# Altium PCB 电调.PcbDoc
Units mil, origin at the board's own origin, x right, y up, seen from the top; angles counter-clockwise.
Board outline 1660.03 x 865.03 mil, 2 copper layers (Top Layer, Bottom Layer); 78 components, 0 nets, 278 pads, 174 vias.
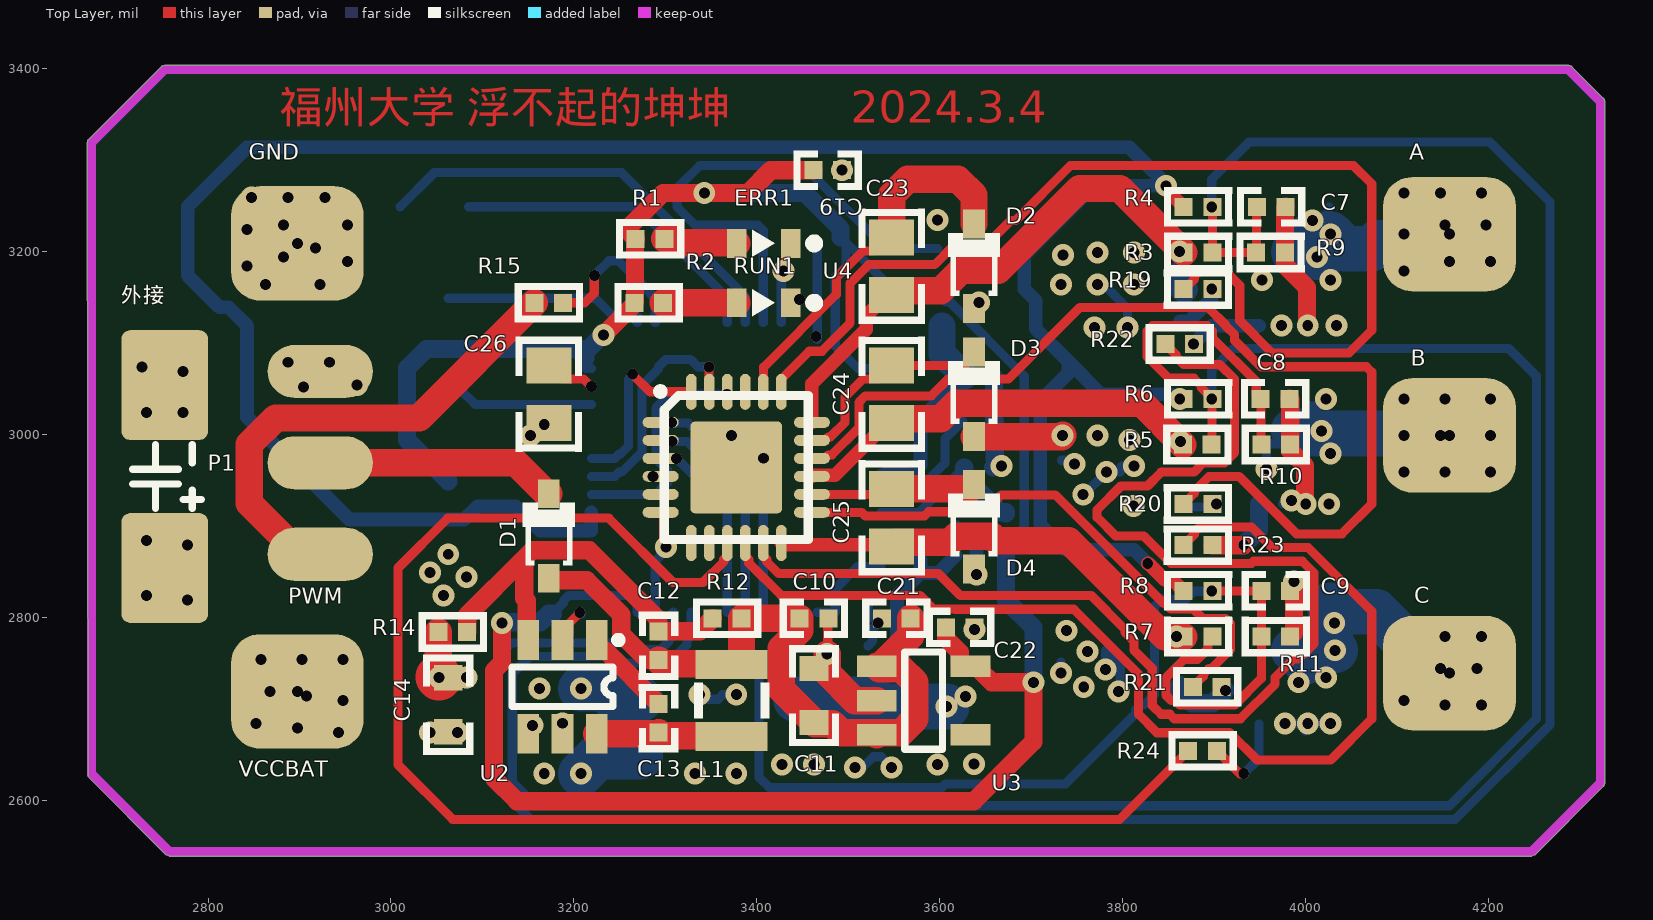
[diagram p0: Top Layer view]
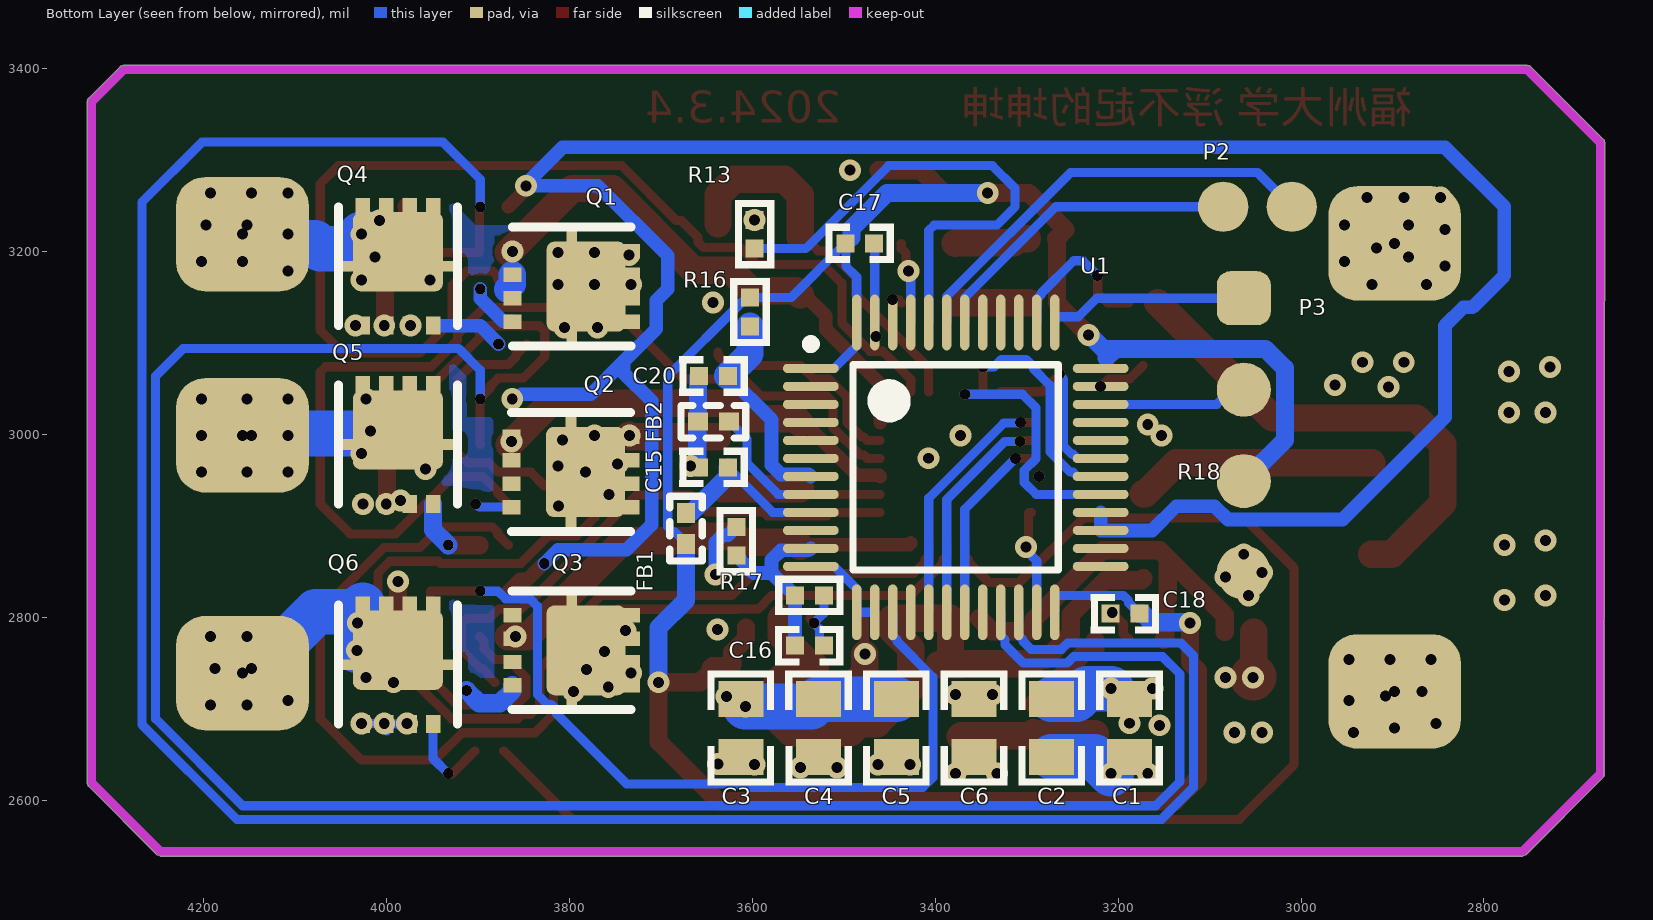
[diagram p1: Bottom Layer view, seen from below]

## Layer stack, top to bottom
Top Solder: solder mask 0.4, Solder Resist, Dk 3.5
Top Layer: signal copper 1.4
Dielectric 1: dielectric 12.6, FR-4, Dk 4.8
Bottom Layer: signal copper 1.4
Bottom Solder: solder mask 0.4, Solder Resist, Dk 3.5

## Board outline
2669.14,2625.41 2754.14,2540.41 2757.69,2538.94 4247.69,2538.94 4251.24,2540.41 4326.24,2615.41 4327.71,2618.96 4327.71,3363.96 4326.24,3367.5 4291.24,3402.5 4287.69,3403.97 2847.72,3403.97 2837.69,3403.97 2847.69,3403.97 2752.69,3403.97 2749.14,3402.5 2669.14,3322.5 2667.68,3318.96

## Design rules (kind name [scope] priority, off if disabled: settings)
Clearance [All] p1: gap=10 ignorepadtopadclearanceinfootprint=FALSE except(0: Arc-Hole Track-Hole SMDPad-Hole THPad-Hole Via-Hole Fill-Hole Poly-Hole Region-Hole Text-Hole)
PolygonConnect [All] p1: connectstyle=Relief reliefconductorwidth=10 reliefentries=4 polygonreliefangle="90 Angle" airgapwidth=10
RoutingVias [All] p1: holewidth=28 width=50 viastyle="Through Hole" minholewidth=28 minwidth=50 maxholewidth=28 maxwidth=50
SolderMaskExpansion [All] p1: expansion=4 istentingtop=FALSE
Width [All] p1: maxlimit=10 minlimit=10 preferedwidth=10
30 further rules are at their usual default settings.

## Components (designator, comment, footprint, x,y, rotation, side; value= is the part's Value field where it differs from the comment)
A "WirePad" WirePad 4157.69,3218.96 r90 top
B "WirePad" WirePad 4157.69,2998.96 r90 top
C "WirePad" WirePad 4157.69,2738.96 r90 top
C1 "22uF 25V X5R" CAPC2012[0805]S-L 3187.69,2678.96 r90 bottom value=22uF
C2 "22uF 25V X5R" CAPC2012[0805]S-L 3272.69,2678.96 r90 bottom value=22uF
C3 "22uF 25V X5R" CAPC2012[0805]S-L 3612.69,2678.96 r90 bottom value=22uF
C4 "22uF 25V X5R" CAPC2012[0805]S-L 3527.69,2678.96 r90 bottom value=22uF
C5 "22uF 25V X5R" CAPC2012[0805]S-L 3442.69,2678.96 r90 bottom value=22uF
C6 "22uF 25V X5R" CAPC2012[0805]S-L 3357.69,2678.96 r90 bottom value=22uF
C7 "100nF(NC) 16V X7R" CAPC1005[0402]S-L 3962.69,3248.96 r180 top value=100nF(NC)
C8 "100nF(NC) 16V X7R" CAPC1005[0402]S-L 3966.94,3038.96 r180 top value=100nF(NC)
C9 "100nF(NC) 16V X7R" CAPC1005[0402]S-L 3967.69,2828.96 r180 top value=100nF(NC)
C10 "100nF 16V X7R" CAPC1005[0402]S-L 3462.69,2798.96 r180 top value=100nF
C11 "22uF 10V X5R" CAPC1608[0603]S-L#1 3462.69,2714.43 r270 top value=22uF
C12 "220pF 50V X7R" CAPC1005[0402]S-L 3292.69,2768.96 r270 top value=220pF
C13 "100nF 16V X7R" CAPC1005[0402]S-L 3292.69,2689.71 r270 top value=100nF
C14 "22uF 10V X5R" CAPC1608[0603]S-L#2 3062.69,2704.43 r270 top value=22uF
C15 "100nF 16V X7R" CAPC1005[0402]S-L 3642.69,2963.96 r180 bottom value=100nF
C16 "100nF 16V X7R" CAPC1005[0402]S-L 3537.69,2768.96 r0 bottom value=100nF
C17 "100nF 16V X7R" CAPC1005[0402]S-L 3482.69,3208.96 r0 bottom value=100nF
C18 "100nF 16V X7R" CAPC1005[0402]S-L 3192.69,2803.96 r180 bottom value=100nF
C19 "100nF 16V X7R" CAPC1005[0402]S-L 3477.69,3288.96 r180 top value=100nF
C20 "100nF 16V X7R" CAPC1005[0402]S-L 3642.69,3063.96 r180 bottom value=100nF
C21 "10uF 10V X5R" CAPC1005[0402]S-L 3552.69,2798.96 r0 top value=10uF
C22 "10uF 10V X5R" CAPC1005[0402]S-L 3622.69,2788.96 r180 top value=10uF
C23 "4.7uF 25V X5R" CAPC2012[0805]S-L 3547.69,3183.96 r90 top value=4.7uF
C24 "4.7uF 25V X5R" CAPC2012[0805]S-L 3547.69,3043.96 r90 top value=4.7uF
C25 "4.7uF 25V X5R" CAPC2012[0805]S-L 3547.69,2908.96 r90 top value=4.7uF
C26 "22uF 25V X5R" CAPC2012[0805]S-L 3172.69,3043.96 r270 top value=22uF
D1 "B5819WS" SOD-323 3172.69,2888.96 r90 top
D2 "B5819WS" SOD-323 3637.69,3183.96 r90 top
D3 "B5819WS" SOD-323 3637.69,3043.96 r90 top
D4 "B5819WS" SOD-323 3637.69,2898.96 r90 top
ERR1 "红色贴片LED" LEDC1608(0603)-L 3407.69,3208.96 r180 top
FB1 "0R @100MHz 500mA" INDC1005[0402]S 3672.69,2897.03 r270 bottom value=0R
FB2 "0R @100MHz 500mA" INDC1005[0402]S 3642.69,3013.96 r0 bottom value=0R
GND "WirePad" WirePad 2897.69,3208.96 r90 top
L1 "3.3uH 2A" SLO2520 3372.69,2708.96 r270 top value=3.3uH
P1 "Header-D-M 1x3P" HEADER1X3 2922.69,2968.96 r0 top
P2 "Header-D-M 1x2P" HEADER1X2 3047.69,3248.96 r180 bottom
P3 "Header-D-M 1x4P" HDR1X4-TP-NS 3062.69,3148.96 r270 bottom
Q1 "TPN2R703NL" TSON3x3 3797.65,3161.75 r270 bottom
Q2 "TPN2R703NL" TSON3x3 3798.44,2958.96 r270 bottom
Q3 "TPN2R703NL" TSON3x3 3797.69,2763.96 r270 bottom
Q4 "TPN2R703NL" TSON3x3 3987.69,3183.96 r180 bottom
Q5 "TPN2R703NL" TSON3x3 3987.69,2988.96 r180 bottom
Q6 "TPN2R703NL" TSON3x3 3987.69,2748.21 r180 bottom
R1 "1k ±1%" RESC1005[0402]S-L 3283.44,3213.96 r0 top value=1k
R2 "2.7K ±1%" RESC1005[0402]S-L 3281.94,3143.96 r0 top value=2.7K
R3 "10K ±1%" RESC1005[0402]S-L 3882.69,3198.96 r180 top value=10K
R4 "1k ±1%" RESC1005[0402]S-L 3882.69,3248.96 r180 top value=1k
R5 "10K ±1%" RESC1005[0402]S-L 3881.94,2988.96 r180 top value=10K
R6 "1k ±1%" RESC1005[0402]S-L 3882.69,3038.96 r180 top value=1k
R7 "10K ±1%" RESC1005[0402]S-L 3882.69,2778.96 r180 top value=10K
R8 "1k ±1%" RESC1005[0402]S-L 3882.69,2828.96 r180 top value=1k
R9 "1k ±1%" RESC1005[0402]S-L 3961.94,3198.96 r180 top value=1k
R10 "1k ±1%" RESC1005[0402]S-L 3967.69,2988.96 r180 top value=1k
R11 "1k ±1%" RESC1005[0402]S-L 3967.69,2778.96 r180 top value=1k
R12 "73.2K ±1%" RESC1005[0402]S-L 3367.69,2798.96 r0 top value=73.2K
R13 "10K ±1%" RESC1005[0402]S-L 3597.69,3218.96 r270 bottom value=10K
R14 "10K ±1%" RESC1005[0402]S-L 3067.69,2783.96 r0 top value=10K
R15 "100R ±1%" RESC1005[0402]S-L 3172.69,3143.96 r180 top value=100R
R16 "10K ±1%" RESC1005[0402]S-L 3602.69,3133.96 r90 bottom value=10K
R17 "47K ±1%" RESC1005[0402]S-L 3617.69,2883.21 r90 bottom value=47K
R18 "10K ±1%" RESC1005[0402]S-L 3537.69,2823.96 r0 bottom value=10K
R19 "4.7R ±1%" RESC1005[0402]S-L 3882.69,3158.96 r0 top value=4.7R
R20 "4.7R ±1%" RESC1005[0402]S-L 3882.69,2923.96 r0 top value=4.7R
R21 "4.7R ±1%" RESC1005[0402]S-L 3892.69,2723.96 r0 top value=4.7R
R22 "4.7R ±1%" RESC1005[0402]S-L 3862.69,3098.96 r0 top value=4.7R
R23 "4.7R ±1%" RESC1005[0402]S-L 3882.69,2878.96 r0 top value=4.7R
R24 "4.7R ±1%" RESC1005[0402]S-L 3887.69,2653.96 r0 top value=4.7R
RUN1 "翠绿贴片LED" LEDC1608(0603)-L 3407.69,3143.96 r180 top
U1 "CH32V203C8T6" LQFP48_L 3377.69,2963.96 r180 bottom
U2 "RY9121E" SOT-23-6 3187.69,2723.96 r270 top
U3 "RT9013-33" SOT-23-5 3582.69,2708.96 r0 top
U4 "FD6288Q" QFN24-4x4 3377.69,2963.96 r0 top
VCCBAT "WirePad" WirePad 2897.69,2718.96 r90 top
外接 "470uF 25V 聚合物固态" "Cap-S-D 3.5-8x14-S" 2752.69,2953.96 r90 top value=470uF

## Footprints (in the part's own frame and the unit in brackets; to place one, negate y for a bottom-side part, rotate by r counter-clockwise, add the part's x,y. Pads: shape width x height; smd on the part's side, far side on the other; paste and mask are expansions set on the pad)
"Cap-S-D 3.5-8x14-S" [mil] "固态直插 3.5mm间距 8x14mm 侧着焊在板边"
  rrect20% 120x95 smd mask+1: 1(-100,0) 2(100,0)
  silkscreen extent -35,-40 35,35
CAPC1005[0402]S-L [mm] "0402贴片电容 有丝印 2脚 1.00x0.50mm IPC高密度"
  rect 0.5x0.5 smd: 1(-0.4,0) 2(0.4,0)
  silkscreen extent -0.95,-0.55 0.95,0.55, body extent -0.5,-0.25 0.5,0.25, height 0.5
CAPC1608[0603]S-L#1 [mm] "0603贴片电容 有丝印 2脚 1.60x0.80mm IPC高密度"
  rect 0.7x0.8 smd: 1(-0.75,0) ""(0.75,0)
  silkscreen extent -1.4,-0.7 1.4,0.7, body extent -0.8,-0.41 0.8,0.41, height 0.79
CAPC1608[0603]S-L#2 [mm] "0603贴片电容 有丝印 2脚 1.60x0.80mm IPC高密度"
  rect 0.7x0.8 smd: 1(-0.75,0) 2(0.75,0)
  silkscreen extent -1.4,-0.7 1.4,0.7, body extent -0.8,-0.41 0.8,0.41, height 0.79
CAPC2012[0805]S-L [mm] "0805贴片电容 有丝印 2脚 2.00x1.20mm IPC高密度"
  rect 1x1.25 smd: 1(-0.8,0) 2(0.8,0)
  silkscreen extent -1.6,-0.93 1.6,0.93, body extent -1,-0.63 1,0.62, height 1.25
HDR1X4-TP-NS [mm] "2.54mm间距,表面焊盘 无丝印"
  rrect50% 1.5x1.5 smd: 1(0,0)
  round 1.5 smd: 2(2.54,0) 3(5.08,0) 4(7.62,0)
HEADER1X2 [mil] "贴片焊盘"
  round 55 smd: 1(-37.5,0) 2(37.5,0)
HEADER1X3 [mil] "表贴焊盘 2.54mm"
  oval 115x58 smd: 1(0,-100) 2(0,0) 3(0,100)
INDC1005[0402]S [mm] "Chip Inductor, 2-Leads, Body 1.00x0.50mm, IPC Medium Density"
  rect 0.55x0.5 smd: 1(-0.43,0) 2(0.43,0)
  silkscreen extent -0.9,-0.45 0.9,0.45, body extent -0.5,-0.25 0.5,0.25, height 0.5
LEDC1608(0603)-L [mm] "LED,Chip;1.60mm L X 0.80mm W X 0.80mm H"
  rect 0.55x0.8 smd: A(0.75,0) C(-0.75,0)
  silkscreen extent -1.53,-0.38 0.33,0.38, body extent -0.8,-0.4 0.8,0.4, height 0.64
LQFP48_L [mm] "Thin QFP, 48-Leads, Body 7x7mm, Pitch 0.5mm, IPC High Density"
  oval 1.55x0.254 smd: 1(-4.025,2.75) 2(-4.025,2.25) 3(-4.025,1.75) 4(-4.025,1.25) 5(-4.025,0.75) 6(-4.025,0.25) 7(-4.025,-0.25) 8(-4.025,-0.75) 9(-4.025,-1.25) 10(-4.025,-1.75) 11(-4.025,-2.25) 12(-4.025,-2.75) 25(4.025,-2.75) 26(4.025,-2.25) 27(4.025,-1.75) 28(4.025,-1.25) 29(4.025,-0.75) 30(4.025,-0.25) 31(4.025,0.25) 32(4.025,0.75) 33(4.025,1.25) 34(4.025,1.75) 35(4.025,2.25) 36(4.025,2.75)
  oval 0.254x1.55 smd: 13(-2.75,-4.025) 14(-2.25,-4.025) 15(-1.75,-4.025) 16(-1.25,-4.025) 17(-0.75,-4.025) 18(-0.25,-4.025) 19(0.25,-4.025) 20(0.75,-4.025) 21(1.25,-4.025) 22(1.75,-4.025) 23(2.25,-4.025) 24(2.75,-4.025) 37(2.75,4.025) 38(2.25,4.025) 39(1.75,4.025) 40(1.25,4.025) 41(0.75,4.025) 42(0.25,4.025) 43(-0.25,4.025) 44(-0.75,4.025) 45(-1.25,4.025) 46(-1.75,4.025) 47(-2.25,4.025) 48(-2.75,4.025)
  silkscreen extent -4.15,-2.85 2.85,3.55, body extent -4.5,-4.5 4.5,4.5, height 1.6
QFN24-4x4 [mm]
  rrect10% 2.55x2.55 smd: 0(0,0)
  oval 1x0.3 smd: 1(-2.1,1.25) 2(-2.1,0.75) 3(-2.1,0.25) 4(-2.1,-0.25) 5(-2.1,-0.75) 6(-2.1,-1.25) 13(2.1,-1.25) 14(2.1,-0.75) 15(2.1,-0.25) 16(2.1,0.25) 17(2.1,0.75) 18(2.1,1.25)
  oval 0.3x1 smd: 7(-1.25,-2.1) 8(-0.75,-2.1) 9(-0.25,-2.1) 10(0.25,-2.1) 11(0.75,-2.1) 12(1.25,-2.1) 19(1.25,2.1) 20(0.75,2.1) 21(0.25,2.1) 22(-0.25,2.1) 23(-0.75,2.1) 24(-1.25,2.1)
  silkscreen extent -2.21,-2 2,2.21, body extent -2,-2 2,2, height 0.9
RESC1005[0402]S-L [mm] "0402贴片电阻 有丝印 2脚 1.00x0.50mm IPC高密度"
  rect 0.5x0.5 smd: 1(-0.4,0) 2(0.4,0)
  silkscreen extent -0.95,-0.55 0.95,0.55, body extent -0.5,-0.25 0.5,0.25, height 0.35
SLO2520 [mm]
  rect 0.8x2 smd: 1(-1,0) 2(1,0)
  silkscreen extent -0.5,-1.05 0.5,1.05, body extent -1.25,-1 1.25,1, height 1.2
SOD-323 [mm] "SOD Diode;1.65mm W X 1.24mm L X 1.16mm H body"
  rect 0.8x0.6 smd: A(-1.175,0) K(1.175,0)
  silkscreen extent -0.83,-0.73 0.92,0.72, body extent -1.3,-0.65 1.3,0.65, height 1
SOT-23-5 [mm] "SOT23, 5-Leads, Body 2.92x2.79mm, Pitch 0.95mm, IPC Medium Density"
  rect 1.1x0.6 smd: 1(-1.3,0.95) 2(-1.3,0) 3(-1.3,-0.95) 4(1.3,-0.95) 5(1.3,0.95)
  silkscreen extent -0.53,-1.35 0.53,1.35, body extent -1.42,-1.46 1.42,1.46, height 1.08
SOT-23-6 [mm] "SOT23, 6-Leads, Body 2.90x2.80mm, Pitch 0.95mm, IPC Medium Density"
  rect 1.1x0.6 smd: 1(-1.3,0.95) 2(-1.3,0) 3(-1.3,-0.95) 4(1.3,-0.95) 5(1.3,0) 6(1.3,0.95)
  silkscreen extent -1.37,-1.4 0.55,1.63, body extent -1.5,-1.5 1.5,1.5, height 1.55
TSON3x3 [mm]
  rect 0.4x0.5 smd: 1(-0.975,1.65) 1(-0.325,1.65) 1(0.325,1.65) 1(0.975,1.65) 2(0.975,-1.65) 3(-0.975,-1.65) 3(-0.325,-1.65) 3(0.325,-1.65)
  rrect20% 3.4x0.3 smd: 1(0,0)
  rrect20% 2.5x2.2 smd: 1(0,0.4)
  silkscreen extent -1.65,-1.65 1.65,1.65, body extent -1.66,-1.65 1.66,1.65, height 0.85
WirePad [mil] "表贴焊盘"
  rrect50% 125x145 hole 12: 1(0,0)

## Part data
A B C GND VCCBAT: "线缆焊盘"
C1 C2 C3 C4 C5 C6 C26: library part "22uF 0805 25V X5R", "贴片瓷片电容; MLCC; 0805(2012);", Voltage=25V, Revision=V1.0, Type=X5R
C7 C8 C9 C10 C13 C15 C16 C17 C18 C19 C20: library part "100nF 0402 16V X7R", "贴片瓷片电容; MLCC; 0402(1005);", Voltage=16V, Revision=V1.0, Type=X7R
C11 C14: library part "22uF 0603 10V X5R", "贴片瓷片电容; MLCC; 0603(1608);", Voltage=10V, Revision=V1.0, Type=X5R
C12: library part "220pF 0402 50V X7R", "贴片瓷片电容; MLCC; 0402(1005);", Voltage=50V, Revision=V1.0, Type=X7R
C21 C22: library part "10uF 0402 10V X5R", "贴片瓷片电容; MLCC; 0402(1005);", Voltage=10V, Revision=V1.0, Type=X5R
C23 C24 C25: library part "4.7uF 0805 25V X5R", "贴片瓷片电容; MLCC; 0805(2012);", Voltage=25V, Revision=V1.0, Type=X5R
D1 D2 D3 D4: "B5819WS 肖特基二极管", Revision=V1.0
ERR1: library part "LED Chip Red", Price(RMB)=0.00, Published=8-Jun-2000, Publisher="Altium Limited", Revision="July-2002: Re-released for DXP Platform."
FB1 FB2: library part FB-Chip, "贴片磁珠", Frequency=@100MHz, DCR=.1m, Imax=500mA, Published=2020-12-18, Revision=V1.0
L1: library part Ind-Power, "功率电感", DCR=.5m, Imax=2A, Price(RMB)=0.000, Published=8-Jun-2000, Publisher="Altium Limited", Revision="July-2002: Re-released for DXP Platform."
P1: "1x3pin, 直插, 排针", Revision=V1.0
P2: "1x2pin, 直插, 排针", Revision=V1.0
P3: "1x4pin, 直插, 排针", Revision=V1.0
Q1 Q2 Q3 Q4 Q5 Q6: "东芝 N沟 MOS"
R1 R4 R6 R8 R9 R10 R11: library part Res-Chip_1, "贴片电阻", Tolerance=±1%, Revision=V1.0
R2: library part Res-Chip_4, "贴片电阻", Tolerance=±1%, Revision=V1.0
R3 R5 R7 R13 R14 R16 R18: library part Res-Chip, "贴片电阻", Tolerance=±1%, Revision=V1.0
R12: library part Res-Chip_5, "贴片电阻", Tolerance=±1%, Revision=V1.0
R15: library part Res-Chip_2, "贴片电阻", Tolerance=±1%, Revision=V1.0
R17: library part Res-Chip_3, "贴片电阻", Tolerance=±1%, Revision=V1.0
R19 R20 R21 R22 R23 R24: library part Res-Chip_6, "贴片电阻", Tolerance=±1%, Revision=V1.0
RUN1: library part "LED Chip Green", Price(RMB)=0.00, Published=8-Jun-2000, Publisher="Altium Limited", Revision="July-2002: Re-released for DXP Platform."
U1: library part CH32V203CxT6, "沁恒青稞32位RISC-V内核单片机 LQFP-48", ComponentLink1Description="Manufacturer Link", ComponentLink1URL=www.st.com/stm32, ComponentLink2Description=Datasheet, ComponentLink2URL=http://www.st.com/stonline/products/literature/ds/13587.pdf, DatasheetVersion="rev6, Mar-2008", PackageDescription="48-Pin Low-Profile Quad Flat Pack, 7 x 7 mm Body, 0.5 mm Pitch (LQFP48)", PackageReference=LQFP48, PackageVersion=Mar-2008, Published=30-May-2008, Publisher="Altium Limited"
U2: "17V 2A 1.2MHz Synchronous Step-Down Regulator", Revision=V1.0
U3: "3.3V 500mA SOT-23-5 LDO"
U4: "FD6288Q 三相栅极驱动器"
外接: library part "S-D 470uF 25V 8x12", "直插固态电容 470uF 25V 8x12", Voltage=25V, Revision=V1.0, Type=聚合物固态

## Via types
v1: diameter 24, hole 12, Top Layer to Bottom Layer, 151 vias
v2: diameter 12, hole 12, Top Layer to Bottom Layer, 23 vias

## Nets (pads, with @x,y where several pads share a name; then routed paths per layer and width w, separated by ;. In a path a pad name is that pad's centre, name@x,y a point inside that pad or via, vN(x,y) a via of type N, cw(c..) or ccw(c..) an arc to the next point about the centre after c; other vN are vias at no path point)
pads on no net: A.1 B.1 C1.1 C1.2 C2.1 C2.2 C3.1 C3.2 C4.1 C4.2 C5.1 C5.2 C6.1 C6.2 C7.1 C7.2 C8.1 C8.2 C9.1 C9.2 C10.1 C10.2 C11. C11.1 C12.1 C12.2 C13.1 C13.2 C14.1 C14.2 C15.1 C15.2 C16.1 C16.2 C17.1 C17.2 C18.1 C18.2 C19.1 C19.2 C20.1 C20.2 C21.1 C21.2 C22.1 C22.2 C23.1 C23.2 C24.1 C24.2 C25.1 C25.2 C26.1 C26.2 C.1 D1.A D1.K D2.A D2.K D3.A D3.K D4.A D4.K ERR1.A ERR1.C FB1.1 FB1.2 FB2.1 FB2.2 GND.1 L1.1 L1.2 P1.1 P1.2 P1.3 P2.1 P2.2 P3.1 P3.2 P3.3 P3.4 Q1.1 Q1.2 Q1.3 Q2.1 Q2.2 Q2.3 Q3.1 Q3.2 Q3.3 Q4.1 Q4.2 Q4.3 Q5.1 Q5.2 Q5.3 Q6.1 Q6.2 Q6.3 R1.1 R1.2 R2.1 R2.2 R3.1 R3.2 R4.1 R4.2 R5.1 R5.2 R6.1 R6.2 R7.1 R7.2 R8.1 R8.2 R9.1 R9.2 R10.1 R10.2 R11.1 R11.2 R12.1 R12.2 R13.1 R13.2 R14.1 R14.2 R15.1 R15.2 R16.1 R16.2 R17.1 R17.2 R18.1 R18.2 R19.1 R19.2 R20.1 R20.2 R21.1 R21.2 R22.1 R22.2 R23.1 R23.2 R24.1 R24.2 RUN1.A RUN1.C U1.1 U1.2 U1.3 U1.4 U1.5 U1.6 U1.7 U1.8 U1.9 U1.10 U1.11 U1.12 U1.13 U1.14 U1.15 U1.16 U1.17 U1.18 U1.19 U1.20 U1.21 U1.22 U1.23 U1.24 U1.25 U1.26 U1.27 U1.28 U1.29 U1.30 U1.31 U1.32 U1.33 U1.34 U1.35 U1.36 U1.37 U1.38 U1.39 U1.40 U1.41 U1.42 U1.43 U1.44 U1.45 U1.46 U1.47 U1.48 U2.1 U2.2 U2.3 U2.4 U2.5 U2.6 U3.1 U3.2 U3.3 U3.4 U3.5 U4.0 U4.1 U4.2 U4.3 U4.4 U4.5 U4.6 U4.7 U4.8 U4.9 U4.10 U4.11 U4.12 U4.13 U4.14 U4.15 U4.16 U4.17 U4.18 U4.19 U4.20 U4.21 U4.22 U4.23 U4.24 VCCBAT.1 外接.1 外接.2
copper on no net: | length 32036.2
  Top Layer w10: v1@2862.69,3153.96 2867.69,3158.96 2897.69,3188.96 2897.69,3198.96 ; v1(2862.69,3163.96) 2897.69,3198.96 ; 2897.69,3208.96 2897.69,3198.96 ; 3083.44,2783.96 3088.28,2788.8 ; 3172.69,3075.45 3187.38,3060.77 3210.46,3060.77 3218.68,3052.54 v2(3219.23,3052.54) ; 3187.69,2775.14 3194.5,2781.95 3194.5,2792.91 3206.51,2804.92 v2(3206.51,2805.47) ; 3188.44,3143.96 3211.83,3143.96 3222.31,3154.43 3222.31,3173.58 v2(3222.69,3173.96) ; v2(3264.06,3065.91) 3283.34,3046.64 3328.48,3046.64 ; 3295.01,2914.75 3297.23,2914.75 3298.07,2913.91 3298.07,2879.69 v1(3300.75,2877.01) ; 3295.01,2973.8 3295.08,2973.73 3312.33,2973.73 v2(3312.4,2973.66) ; 3295.01,2993.49 3306.21,2993.49 v2(3307.27,2992.43) ; 3295.01,3013.17 3306.53,3013.17 v2(3306.89,3012.81) ; v2(3347.69,3073.96) 3347.93,3073.72 3347.93,3046.87 3348.16,3046.64 ; 3367.85,2881.28 3367.85,2867.01 3364.07,2863.23 3364.07,2860.91 3341.26,2838.1 3308.55,2838.1 3238.2,2908.45 3062.18,2908.45 3007.69,2853.96 3007.69,2638.96 3067.69,2578.96 3796.94,2578.96 3871.94,2653.96 ; 3387.53,2881.28 3387.53,2867.01 3391.31,2863.23 3391.31,2859.38 3426.74,2823.96 3578.79,2823.96 3593.79,2808.96 3616.48,2808.96 3616.63,2808.8 3746.7,2808.8 3817.69,2737.81 3817.69,2693.96 3837.85,2673.8 3917.42,2673.8 3947.27,2643.96 4027.69,2643.96 4072.69,2688.96 4072.69,2806.61 4003.02,2876.29 3963.65,2876.29 3940.97,2898.96 3884.61,2898.96 3878.6,2892.94 3878.6,2890.61 3866.94,2878.96 ; 3407.22,2881.28 3407.22,2867.01 3411,2863.23 3411,2860.91 3424.13,2847.78 3598.87,2847.78 3622.85,2823.8 3765.92,2823.8 3802.69,2787.03 3802.69,2783.96 3812.69,2773.96 3812.69,2764.03 3832.69,2744.03 3832.69,2703.6 3842.34,2693.96 3851.9,2693.96 3856.74,2689.12 3929.06,2689.12 3966.94,2727 3966.94,2734.32 3987.35,2754.73 3993.03,2754.73 4009.69,2771.38 4009.69,2848.4 3996.8,2861.29 3943.3,2861.29 3940.97,2858.96 3853.12,2858.96 3823.12,2888.96 3792.69,2888.96 3772.39,2909.26 3772.39,2917.54 3798.49,2943.64 3827.38,2943.64 3842.53,2958.8 3878.24,2958.8 3888.56,2969.12 3911.68,2969.12 3922.69,2980.13 3922.69,3060.32 3906.47,3076.54 3867.03,3076.54 3858.6,3084.97 3858.6,3087.3 3846.94,3098.96 ; 3407.22,3046.64 3407.56,3046.98 3407.56,3073.59 3487.2,3153.22 3487.2,3171.62 3516.35,3200.77 3528.08,3200.77 3542.77,3215.45 3547.69,3215.45 ; 3426.9,3046.64 3426.9,3060.41 3457.49,3091 3471.27,3091 3502.2,3121.93 3502.2,3165.4 3522.56,3185.77 3594.56,3185.77 3613.26,3204.47 3653.64,3204.47 3659.5,3210.33 3659.5,3215.77 3677.69,3233.96 3683.13,3233.96 3743.13,3293.96 4052.69,3293.96 4072.69,3273.96 4072.69,3113.96 4047.69,3088.96 3963.9,3088.96 3928.28,3124.58 3928.28,3162.94 3912.42,3178.8 3884.45,3178.8 3878.6,3172.94 3878.6,3169.66 3872.74,3163.8 3871.78,3163.8 3866.94,3158.96 ; v1(3429.22,3178.96) 3431.9,3181.64 3431.9,3198.21 3437.22,3203.53 3437.22,3208.96 ; 3437.22,3143.96 3440.81,3147.55 v2(3446.59,3147.55) ; 3460.37,2914.75 3514.97,2914.75 3518.94,2910.77 3583.35,2910.77 3588.03,2915.45 3649.63,2915.45 3660.67,2926.49 3660.67,2926.93 3667.69,2933.96 3726.48,2933.96 3845.46,2814.97 3847.1,2814.97 3853.12,2808.96 3877.69,2808.96 3887.85,2798.8 3912.42,2798.8 3918.28,2792.94 3918.28,2764.97 3897.11,2743.8 3894.45,2743.8 3888.6,2737.94 3888.6,2735.61 3881.78,2728.8 ; 3460.37,2934.43 3541.67,2934.43 3547.69,2940.45 ; 3460.37,2973.8 3474.64,2973.8 3478.42,2977.58 3482.26,2977.58 3511.73,3007.05 3511.73,3034.94 3518.94,3042.15 3590.94,3042.15 3609.25,3060.45 3675.09,3060.45 3753.6,3138.96 3893.48,3138.96 3913.28,3119.16 3913.28,3118.37 3922.69,3108.96 3922.69,3102.75 3951.48,3073.96 4066.83,3073.96 4072.69,3068.1 4072.69,2923.96 4040.02,2891.29 3990.36,2891.29 3927.53,2954.12 3894.77,2954.12 3878.6,2937.94 3878.6,2935.61 3866.94,2923.96 ; 3460.37,2993.49 3474.64,2993.49 3478.42,2997.27 3480.74,2997.27 3496.73,3013.26 3496.73,3041.15 3516.35,3060.77 3533.01,3060.77 3547.69,3075.45 3626.86,3075.45 3637.69,3086.28 3637.69,3090.22 ; v1(3476.99,2759.79) 3477.71,2760.51 3477.71,2798.23 3478.44,2798.96 ; v2(3532.5,2793.96) 3536.94,2798.4 3536.94,2798.96 ; 3632.93,2940.45 3637.69,2945.22 ; v1@3637.69,2852.7 3640.47,2849.92 v1(3640.47,2846.59) ; v1@3637.69,3137.7 3637.69,3138.96 v1(3643.05,3144.32) ; v1(3638.44,2786.8) v1@3638.44,2788.96 ; v2(3897.69,2828.96) 3898.44,2828.96 3951.94,2828.96 3951.94,2778.96 3951.94,2733.21 3922.85,2704.12 3862.96,2704.12 3858.12,2708.96 3853.55,2708.96 3847.69,2714.82 3847.69,2733.96 3867.69,2753.96 3882.08,2753.96 3893.6,2765.47 3893.6,2774.12 3898.44,2778.96 ; 3897.69,2988.96 3898.06,2989.33 3898.06,3038.58 v2(3897.69,3038.96) 3897.69,3039.71 3886.78,3050.61 3886.78,3052.94 3878.19,3061.54 3850.54,3061.54 3827.1,3084.97 3827.1,3112.94 3832.96,3118.8 3892.42,3118.8 3898.28,3112.94 3898.28,3105.94 3946.35,3057.87 3946.35,3043.8 3951.57,3038.58 3951.57,2989.33 3951.94,2988.96 ; v2(3897.69,3248.96) 3898.44,3248.21 3898.44,3198.96 3946.19,3198.96 3946.57,3199.33 3946.57,3248.58 3946.94,3248.96 ; 3903.44,2653.96 3928.44,2628.96 v2(3932.69,2628.96) ; v2@3908.44,2723.96 3908.85,2723.96 v2(3912.69,2720.12)
  Top Layer w15: 3426.9,2881.28 3426.9,2880.97 3428.5,2879.37 3545.78,2879.37 3547.69,2877.46 ; 3460.37,2954.12 3461.65,2955.39 3485.7,2955.39 3542.77,3012.46 3547.69,3012.46 ; 3460.37,3013.17 3460.37,3055.35 3519.7,3114.68 3519.7,3129.39 3542.77,3152.46 3547.69,3152.46 ; v2(3827.69,2858.96) 3828.37,2858.96 3845.87,2841.46 3854.44,2841.46 3866.94,2828.96 ; v1(3847.69,3271.96) 3849.41,3270.24 3849.41,3266.49 3866.94,3248.96
  Top Layer w20: 3083.44,2783.96 3083.44,2802.22 3145.88,2864.66 ; v1(3121.48,2793.81) 3121.48,2750.6 3112.69,2741.81 3112.69,2623.96 3137.69,2598.96 3637.69,2598.96 3702.69,2663.96 v1(3702.69,2728.96) 3657.24,2728.96 3645.53,2740.67 3645.53,2744.55 3643.71,2746.36 3633.87,2746.36 ; 3150.29,2775.14 3148.48,2776.95 3148.48,2818.14 3145.88,2820.74 3145.88,2864.66 ; 3172.69,2842.7 3172.69,2842.22 3174.5,2840.41 3214.5,2840.41 3251.9,2803.01 3251.9,2781.6 3280.29,2753.21 3292.69,2753.21 ; 3225.09,2775.14 3225.09,2765.3 3226.9,2763.49 3234.66,2763.49 3292.69,2705.45 ; v1(3232.42,3108.96) 3266.19,3142.73 3266.19,3143.96 3266.94,3144.71 3266.94,3213.21 3265.97,3214.18 ; 3267.69,3213.96 3257.69,3223.96 3297.69,3263.96 v1(3342.69,3263.96) 3390.36,3263.96 3415.36,3288.96 3461.94,3288.96 ; 3351.94,2798.96 3337.69,2784.71 3292.69,2784.71 3292.69,2797.57 3216.82,2873.45 3154.67,2873.45 3145.88,2864.66 ; 3606.94,2788.96 3606.94,2776.91 3622.22,2761.64 3622.22,2748.17 3625.26,2745.13 ; 3898.44,2878.96 v2(3932.69,2878.96) ; 3978.44,3248.96 3977.69,3248.21 3977.69,3198.96 3977.69,3185.04 4001.93,3160.81 4001.93,3119.72 v1(4002.69,3118.96) ; 3982.69,3038.96 3983.44,3038.21 3983.44,2988.96 3983.44,2982.13 3999.72,2965.85 3999.72,2924.76 v1(4000.49,2924) ; 3983.44,2778.96 3987.69,2783.21 v1(3987.69,2839.29)
  Top Layer w30: 2922.69,2868.96 2900.84,2868.96 2845.19,2924.61 2845.19,2989.25 2873.89,3017.96 3030.94,3017.96 3156.94,3143.96 ; 2922.69,2968.96 3136.51,2968.96 3170.25,2935.22 3172.69,2935.22 ; v1@3051.94,2734.71 3051.94,2783.96 ; 3225.09,2672.78 3291.51,2672.78 3292.69,2673.96 3296.31,2670.34 3371.94,2670.34 3372.69,2669.59 ; 3292.69,2753.21 3296.82,2749.08 3371.94,2749.08 3372.69,2748.33 3382.69,2748.33 ; 3297.69,3143.96 3378.16,3143.96 ; 3299.19,3213.96 3309.74,3213.96 3313.99,3209.71 3377.41,3209.71 3378.16,3208.96 ; 3396.31,2748.33 3382.69,2748.33 ; v1(3476.99,2759.79) 3476.99,2739.13 3507.16,2708.96 3531.51,2708.96 ; 3531.51,2746.36 3533.91,2743.96 3558.26,2743.96 3573.16,2729.05 3573.16,2688.86 3558.26,2673.96 3533.91,2673.96 3531.51,2671.56 3529.11,2673.96 3492.66,2673.96 3482.94,2683.68 3463.44,2683.68 3462.69,2684.43 3462.69,2684.9 3462.69,2685.38 3426.94,2721.12 3426.94,2766.02 3446.94,2786.02 3446.94,2798.96 3383.44,2798.96 3383.44,2749.08 3382.69,2748.33 ; 3534.97,2746.36 3568.44,2779.82 3568.44,2798.96 ; 3547.69,2877.46 3552.38,2882.15 3611.3,2882.15 3617.6,2888.45 3657.79,2888.45 3662.27,2883.96 3741.12,2883.96 3846.12,2778.96 v1@3866.94,2778.96 ; 3547.69,2940.45 3632.93,2940.45 ; 3547.69,3012.46 3552.38,3017.15 3601.3,3017.15 3618.11,3033.96 3821.19,3033.96 v1@3866.19,2988.96 ; 3547.69,3152.46 3552.38,3157.15 3601.3,3157.15 3623.62,3179.47 3664,3179.47 3753.49,3268.96 3796.94,3268.96 v1@3866.94,3198.96 ; 3547.69,3215.45 3547.69,3261.38 3565.26,3278.96 3620.12,3278.96 3637.69,3261.38 3637.69,3230.22 ; 3637.69,2997.7 3733.43,2997.7 v1(3734.69,2998.96)
  Top Layer w50: v1@3051.94,2734.71 v1(3052.69,2733.96)
  Bottom Layer w10: 3010.19,3248.96 3047.69,3286.46 3252.07,3286.46 3387.53,3150.99 3387.53,3122.42 ; 3062.69,3048.96 3075.96,3048.96 3092.07,3032.86 3219.23,3032.86 ; 3062.69,3148.96 3223.54,3148.96 3243.73,3128.77 3269.42,3128.77 3269.42,3122.42 ; 3085.19,3248.96 3268.35,3248.96 3367.85,3149.46 3367.85,3122.42 ; 3176.94,2803.96 3188.6,2815.61 3188.6,2817.94 3194.45,2823.8 3269.42,2823.8 3269.42,2805.49 ; v2(3206.51,2805.47) 3208.02,2803.96 v2@3208.44,2803.96 ; 3212.69,3083.96 3212.69,3072.23 3219.23,3072.23 ; 3219.23,2934.43 3289.63,2934.43 3302.69,2947.49 3302.69,2960.74 3289.74,2973.7 3289.74,3028.96 3304.74,3043.96 v2(3367.69,3043.96) ; 3219.23,2954.12 3244.74,2954.12 3249.42,2958.8 3252.48,2958.8 3274.74,2981.06 3274.74,3053.96 3292.69,3071.91 3292.69,3073.96 3300.64,3081.91 3327.69,3081.91 3335.64,3073.96 v2(3347.69,3073.96) ; 3219.23,2973.8 3244.74,2973.8 3249.42,2978.49 3250.95,2978.49 3259.74,2987.27 3259.74,3060.17 v2(3264.06,3065.91) ; v2(3222.69,3173.96) 3238.69,3189.96 3248.61,3189.96 3284.42,3154.15 3284.42,3152.62 3289.11,3147.93 3289.11,3122.42 ; 3289.11,2805.49 3289.11,2861.59 3300.75,2873.23 v1(3300.75,2877.01) ; v2(3306.89,3012.81) 3307.27,3012.43 3325.12,3012.43 3407.22,2930.33 3407.22,2805.49 ; v2(3307.27,2992.43) 3307.46,2992.24 3324.1,2992.24 3387.53,2928.8 3387.53,2805.49 ; 3308.79,2805.49 3308.79,2779.98 3304.11,2775.3 3304.11,2773.77 3295.32,2764.98 3262.13,2764.98 3255.15,2771.96 3131.55,2771.96 3117.69,2758.1 3117.69,2613.96 3152.69,2578.96 4163.9,2578.96 4267.69,2682.74 4267.69,3253.96 4201.83,3319.82 3938.55,3319.82 3897.69,3278.96 v2(3897.69,3248.96) ; v2(3312.4,2973.66) 3367.85,2918.21 3367.85,2805.49 ; 3328.48,2805.49 3328.48,2779.98 3323.79,2775.3 3323.79,2770.06 3303.71,2749.98 3255.91,2749.98 3248.94,2756.96 3151.55,2756.96 3132.69,2738.1 3132.69,2620.17 3158.9,2593.96 4157.69,2593.96 4252.69,2688.96 4252.69,3063.96 4222.69,3093.96 3921.39,3093.96 3897.69,3070.26 v2(3897.69,3038.96) ; v1(3337.69,2715.58) 3342.82,2710.45 3357.69,2710.45 3362.82,2715.58 v1(3377.69,2715.58) ; 3407.22,3122.42 3407.22,3223.1 3401.36,3228.96 3332.69,3228.96 3312.69,3248.96 3312.69,3268.96 3337.69,3293.96 3451.12,3293.96 3541.87,3203.21 3597.69,3203.21 ; 3426.9,3122.42 3426.9,3176.64 v1(3429.22,3178.96) ; 3446.59,2805.49 3446.59,2779.98 3441.9,2775.3 3441.9,2773.77 3402.69,2734.56 3402.69,2624.82 3413.55,2613.96 3602.69,2613.96 3606.51,2617.78 3737.79,2617.78 3814.34,2694.33 3814.34,2698.89 3820.2,2704.75 3824.32,2704.75 3835.25,2715.68 3835.25,2812.24 3843.23,2820.22 3869.94,2820.22 3878.3,2828.58 3897.31,2828.58 v2(3897.69,2828.96) ; v2(3464.64,3107) v2@3466.27,3107 ; 3466.27,2805.49 3485.96,2805.49 3485.96,2831.01 3510.64,2855.69 3536.15,2855.69 ; v2@3466.27,3103.96 v2@3466.27,3107 ; 3466.94,3208.96 3466.27,3208.29 v2@3466.27,3107 ; v1(3507.69,2635.96) 3516.19,2635.96 3527.69,2647.46 3536.19,2647.46 v1(3547.69,2635.96) ; 3521.94,2768.96 3526.78,2773.8 3526.78,2787.7 3532.5,2793.42 v2(3532.5,2793.96) 3521.94,2804.52 3521.94,2823.96 ; 3536.15,2914.75 3577.73,2914.75 3626.94,2963.96 ; 3536.15,2934.43 3571.79,2934.43 3605.79,2968.43 3605.79,2994.97 3624.78,3013.96 3625.76,3013.96 ; 3536.15,3072.23 3510.64,3072.23 3485.96,3096.91 3485.96,3122.42 3485.96,3172.21 3497.87,3184.12 3497.87,3208.39 3499.01,3208.39 3557.69,3149.71 3602.69,3149.71 3607.53,3144.86 3611.39,3144.86 3692.69,3063.57 3692.69,2899.15 3686.54,2893 3684.6,2893 3672.69,2881.08 3672.69,2880.1 ; v1(3732.69,2738.96) 3732.71,2751.14 ; 3733.48,2971.75 3744.66,2971.75 3747.69,2968.72 v1(3747.69,2967.53) ; v1(3757.13,2934.51) 3758.25,2934.51 v1(3782.69,2958.96) 3797.53,2958.96 3798.44,2959.86 3798.44,2964.74 3799.34,2965.64 v1(3812.69,2965.64) ; v1(3781.56,2742.83) 3781.56,2763.58 3781.94,2763.96 3797.69,2748.21 3797.69,2720.96 v1(3795.69,2718.96) ; v1@3781.9,3161.75 3805.47,3138.19 v1(3805.47,3116.96) ; v1(3859.3,2778.96) 3861.51,2776.75 v1@3862.65,2776.75 ; 3863.4,2920.57 3898.76,2920.57 3902.15,2923.96 v2(3902.69,2923.96) ; v2(3932.69,2628.96) 3949.3,2645.57 3949.3,2683.25 ; v1(3957.69,2962.12) 3957.69,2988.05 3959.5,2989.86 3987.69,2989.86 ; v1(3974.18,3118.96) 3974.86,3118.96 v1@3974.9,3119 ; v1@3974.9,2924 3976.85,2925.95 3982.9,2925.95 v1(3984.86,2927.91) ; v1(3977.69,2683.96) 3977.69,2683.33 3977.77,2683.25 v1@4000.49,2683.25 ; 3987.69,2992.12 3987.69,3004.71 ; 3987.69,3199.71 3987.69,3203.96 ; 3987.69,3213.96 4001.94,3213.96 ; v1(4002.69,2683.96) 4001.98,2683.25 v1@4000.49,2683.25 ; 4007.19,2749.46 v1(4022.69,2733.96) ; v1(4017.69,3003.96) 4016.94,3004.71 3987.69,3004.71 ; v1(4022.69,3038.96) 4014.86,3031.13 4004.86,3031.13 3997.03,3023.3 3987.69,3023.3 3987.69,3004.71 ; 4026.08,3248.92 4024.66,3247.5 4024.66,3221.99 v1(4027.69,3218.96) ; v1(4027.69,2683.96) 4007.69,2683.96 3999.69,2675.96 3999.69,2682.45 v1@4000.49,2683.25 ; v1@4030.11,3119 4034.14,3119 v1(4034.18,3118.96)
  Bottom Layer w15: 3219.23,2914.75 3219.23,2895.06 3162.99,2895.06 3136.59,2921.46 3094.63,2921.46 3080.1,2906.93 2954.72,2906.93 2842.69,3018.96 2842.69,3118.96 2822.69,3138.96 2812.69,3138.96 2777.69,3173.96 2777.69,3248.96 2842.69,3313.96 3807.69,3313.96 3847.69,3273.96 v1(3847.69,3271.96) 3769.12,3271.96 3692.69,3195.53 3692.69,3158.96 3705.18,3146.47 3705.18,3115.48 3740.94,3079.72 ; 3536.15,2875.38 3538.34,2873.19 3568.92,2873.19 3579.17,2862.94 3579.17,2848.44 ; 3536.15,2954.12 3538.34,2956.3 3568.92,2956.3 3579.17,2966.55 3579.17,3016.18 3626.94,3063.96 ; 3553.44,2768.96 3553.44,2823.96 3567.67,2838.19 3568.92,2838.19 3579.17,2848.44 ; 3617.69,2867.46 3598.67,2848.44 3579.17,2848.44 ; 3617.69,2898.96 3626.84,2889.8 3632.71,2889.8 3640.47,2882.05 v1(3640.47,2846.59) ; v2(3827.69,2858.96) 3812.69,2873.96 3737.69,2873.96 3710.19,2901.46 3710.19,3036.46 3740.94,3067.21 3740.94,3079.72 ; v1@3852.69,3043.96 3776.71,3043.96 3740.94,3079.72 ; 3862.61,3123.37 3862.99,3123.74 3872.79,3123.74 3897.69,3148.64 v2(3897.69,3158.96) ; v2(3877.69,3098.96) 3897.73,3119 3949.3,3119
  Bottom Layer w20: 3062.69,2948.96 3017.69,2993.96 3017.69,3072.24 3038.93,3093.49 3203.16,3093.49 ; v1(3121.48,2793.81) 3122.24,2794.58 3163.33,2794.58 3172.71,2803.96 3176.94,2803.96 ; 3212.69,3083.96 3203.16,3093.49 ; v1(3232.42,3108.96) 3228.65,3106 3216.14,3093.49 3203.16,3093.49 ; v1(3342.69,3263.96) 3452.84,3263.96 3491.78,3225.01 3491.78,3215.61 ; 3626.94,2963.96 3626.94,2954.56 3666.71,2914.78 3672.53,2914.78 3672.69,2914.63 3672.69,2913.96 ; v1@3658.44,2963.96 3660.18,2965.7 v1(3667.69,2965.7) 3660.45,2972.94 3660.45,3013.8 3660.29,3013.96 3659.62,3013.96 3659.62,3062.78 3658.44,3063.96 ; 3672.69,2880.1 3672.69,2818.67 3702.69,2788.67 v1(3702.69,2728.96) ; 3862.65,2725.57 3862.65,2719.71 3876.34,2706.03 3898.76,2706.03 3912.69,2719.96 v2(3912.69,2720.12) ; v2(3932.69,2878.96) 3949.3,2895.57 3949.3,2924
  Bottom Layer w30: 3602.69,3118.21 3602.69,3088.21 3626.94,3063.96 ; 3862.61,3174.55 3862.61,3164.04 3867.69,3158.96
  Bottom Layer w50: v1(3207.69,2628.96) 3226.19,2647.46 3272.69,2647.46 ; v1(3207.69,2721.96) 3234.44,2721.96 3245.94,2710.45 3272.69,2710.45 ; 3442.69,2710.45 3527.69,2710.45 3535.6,2702.55 v1(3607.69,2702.55) ; 3987.69,2763.96 3993.29,2763.96 3996.29,2766.96 4011.9,2766.96 4011.9,2763.96 v1(4032.69,2763.96) ; 3987.69,3004.71 3991.44,3000.96 4027.69,3000.96 4107.69,3000.96 4155.69,3000.96 v1@4157.69,2998.96 ; 3987.69,3199.71 3997.32,3209.33 ; 4000.19,2751.46 4000.19,2755.25 ; 4001.94,3213.96 4006.94,3218.96 v1(4027.69,3218.96) 4043.6,3203.05 4072.39,3203.05 4078.67,3209.33 4148.06,3209.33 v1@4157.69,3218.96 ; 4026.08,2813.17 4027.69,2811.56 4027.69,2793.96 4039.69,2805.96 4077.31,2805.96 4144.31,2738.96 v1@4157.69,2738.96 ; v1@4029.69,2795.96 v1(4031.69,2793.96) ; v1(4012.69,3193.96) 4021.78,3203.05 4027.69,3203.05 4026.78,3203.05 4017.69,3193.96 v1(4012.69,3193.96)
  other v1: 3167.69,2628.96 3332.69,2628.96 3377.69,2628.96 3427.69,2638.96 3462.69,2638.96 3597.69,2638.96 3637.69,2639.78 2942.69,2673.96 3042.69,2673.96 3072.69,2673.96 2897.69,2678.96 3154.69,2681.93 2852.69,2683.96 3187.69,2684.15 4152.69,2703.96 4192.69,2703.96 2947.69,2708.96 4107.69,2708.96 3628.59,2713.45 2907.69,2713.96 2867.69,2718.96 3162.69,2721.96 3757.69,2723.96 3992.69,2728.96 3082.69,2733.96 4147.69,2743.96 4187.69,2743.96 2857.69,2753.96 2902.69,2753.96 2947.69,2753.96 3761.56,2762.83 4152.69,2778.96 4192.69,2778.96 3739.06,2785.33 2777.69,2818.96 2732.69,2823.96 3057.69,2823.96 3082.69,2843.96 3042.69,2848.96 3062.69,2868.96 2777.69,2878.96 2732.69,2883.96 3812.24,2921.64 4026.08,2924 4107.69,2958.96 4152.69,2958.96 4202.69,2958.96 3407.69,2973.96 4027.69,2978.96 3863.4,2992.34 3807.69,2993.96 3152.69,2998.96 3372.69,2998.96 3772.69,2998.96 4107.69,2998.96 4147.69,2998.96 4202.69,2998.96 3167.69,3010.86 2732.69,3023.96 2772.69,3023.96 3862.69,3038.96 4107.69,3038.96 4152.69,3038.96 4202.69,3038.96 2904.51,3051.78 2962.69,3053.96 2772.69,3068.96 2727.69,3073.96 2887.69,3078.96 2932.69,3078.96 3769.34,3116.96 2922.69,3163.96 3732.69,3163.96 3772.69,3163.96 3812.69,3163.96 3952.69,3168.96 4027.69,3168.96 4107.69,3178.96 2842.69,3183.96 2952.69,3188.96 4157.69,3188.96 4202.69,3188.96 2882.69,3193.96 3734.85,3196.01 3772.69,3198.96 3812.69,3198.96 3862.61,3200.14 2917.69,3203.96 4107.69,3218.96 2842.69,3223.96 2882.69,3228.96 2952.69,3228.96 4152.69,3228.96 4197.69,3228.96 4007.69,3233.96 3597.69,3234.71 2847.69,3258.96 2887.69,3258.96 2927.69,3258.96 4107.69,3263.96 4147.69,3263.96 4192.69,3263.96 3493.44,3288.96
  other v2: 3286.69,2954.12

## Polygon pours and split planes (outlines as drawn)
no net on Bottom Layer "NONET_L01_P-001" (solid, pour order 2): 3867.69,3133.96 3847.69,3133.96 3847.69,3218.96 3857.69,3228.96 3902.69,3228.96 3932.69,3258.96 3932.69,3273.96 4057.69,3273.96 4072.69,3258.96 4072.69,3163.96 4057.69,3163.96 4042.69,3148.96 3937.69,3148.96 3927.69,3143.96
no net on Bottom Layer "NONET_L01_P-001" (solid, pour order 1): 3967.69,3078.96 3927.69,3078.96 3912.69,3063.96 3912.69,3018.96 3867.69,3018.96 3857.69,3008.96 3842.69,3008.96 3837.69,3003.96 3837.69,2943.96 3851.54,2930.11 3927.69,2943.96 3947.69,2943.96 3957.69,2953.96 4062.69,2953.96 4062.69,2968.96 4077.69,2983.96 4077.69,3068.96 3977.69,3068.96
no net on Bottom Layer "NONET_L01_P-001" (solid, pour order 0): 3957.69,2838.96 3917.69,2813.96 3847.69,2813.96 3842.69,2808.96 3842.69,2738.96 3847.69,2733.96 3927.69,2733.96 3932.69,2728.96 3932.69,2708.96 3937.69,2703.96 4067.69,2703.96 4072.69,2703.96 4072.69,2833.96

## Keep-outs
Keep-Out Layer:
  lines w10: 2837.69,3398.96 4287.69,3398.96 4322.69,3363.96 4322.69,2618.96 4247.69,2543.96 2757.69,2543.96 2672.69,2628.96 2672.69,2795.21 2672.69,2938.33 2672.69,3014.58 2672.69,3157.71 2672.69,3318.96 2752.69,3398.96 2847.69,3398.96

## Other copper
Top Layer:
  text "福州大学 浮不起的坤坤" at 2877.69,3329.62 h60
  text "2024.3.4" at 3502.65,3329.62 h60

## Silkscreen, mask and mechanical layers (free items; w line width, h text height)
Top Overlay:
  text "PWM" at 2887.69,2808.96 h30